# Altium PCB LM2596S_5.0.PcbDoc
Units mm, origin at the board's own origin, x right, y up, seen from the top; angles counter-clockwise.
Board outline 47.62 x 28.7 mm, 2 copper layers (Top Layer, Bottom Layer); 9 components, 4 nets, 22 pads, 60 vias.
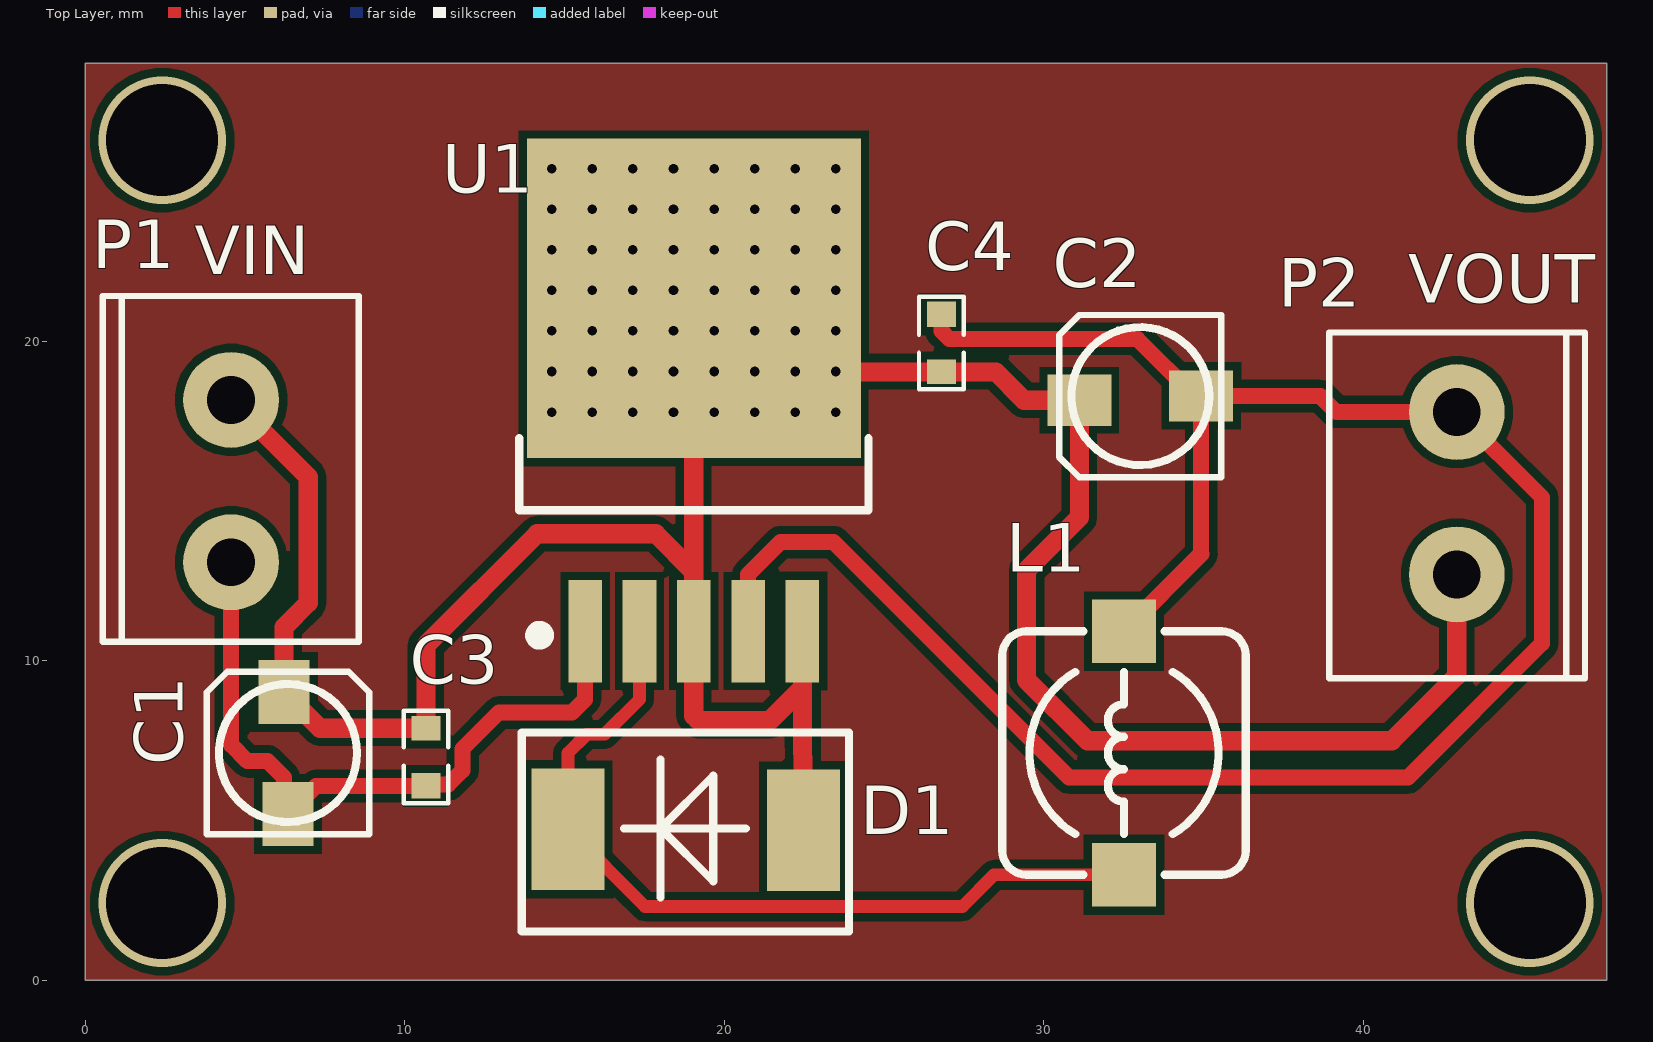
[diagram p0: Top Layer view]
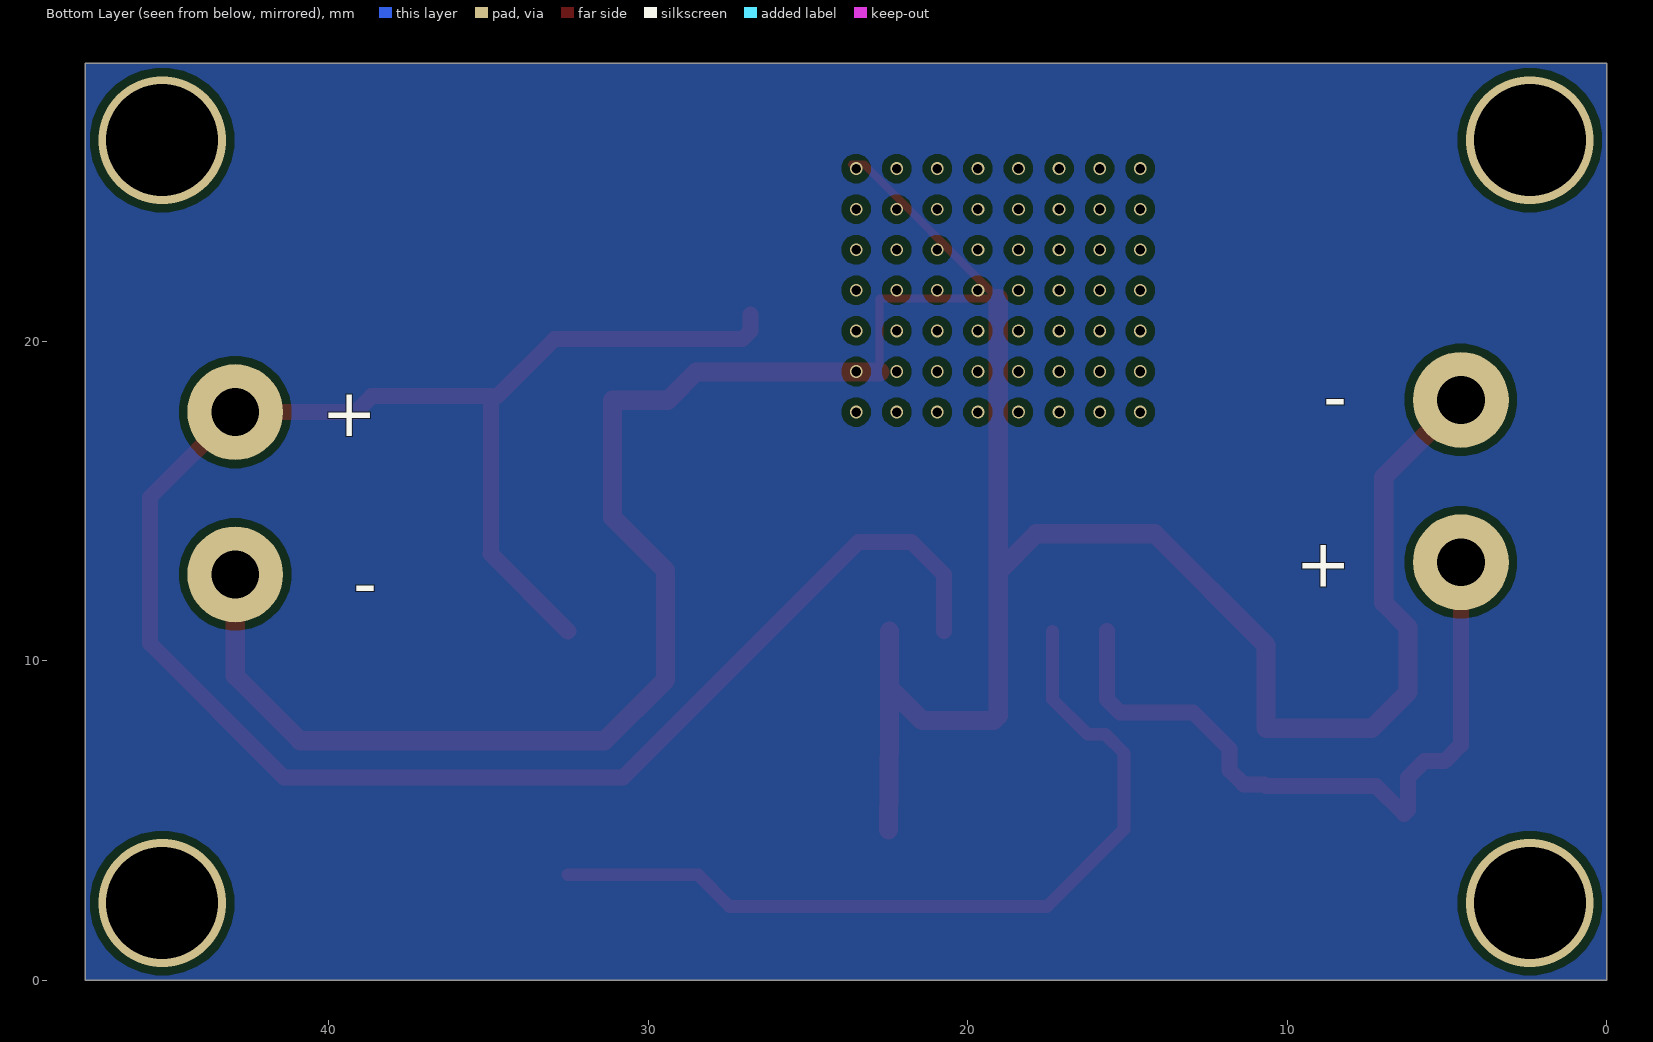
[diagram p1: Bottom Layer view, seen from below]
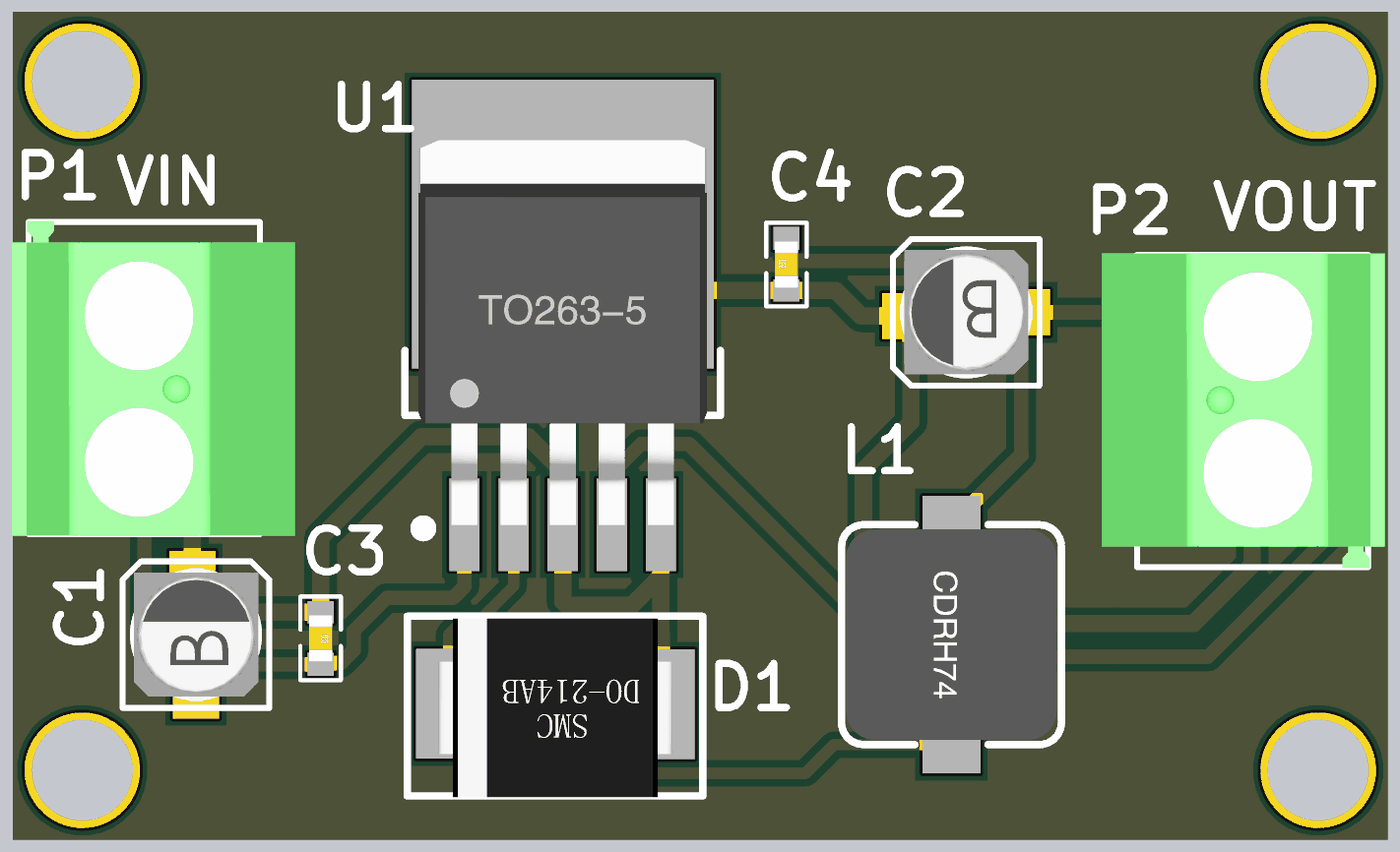
[diagram p2: 3D render of the assembled board from above, using the file's embedded part models]

## Layer stack, top to bottom
Top Solder: solder mask 0.0102, Solder Resist, Dk 3.5
Top Layer: signal copper 0.0356
Dielectric 1: dielectric 0.32, FR-4, Dk 4.8
Bottom Layer: signal copper 0.0356
Bottom Solder: solder mask 0.0102, Solder Resist, Dk 3.5

## Board outline
0,0 0,28.702 47.625,28.702 47.625,0

## Design rules (kind name [scope] priority, off if disabled: settings)
Clearance [All] p1: gap=0.254 ignorepadtopadclearanceinfootprint=FALSE except(0: Arc-Hole Track-Hole SMDPad-Hole THPad-Hole Via-Hole Fill-Hole Poly-Hole Region-Hole Text-Hole)
PolygonConnect [All] p1: connectstyle=Relief reliefconductorwidth=0.254 reliefentries=4 polygonreliefangle="90 Angle" airgapwidth=0.254
RoutingVias [All] p1: holewidth=0.711 width=1.27 viastyle="Through Hole" minholewidth=0.711 minwidth=1.27 maxholewidth=0.711 maxwidth=1.27
SolderMaskExpansion [All] p1: expansion=0.102 istentingtop=FALSE
Width [All] p1: maxlimit=0.254 minlimit=0.254 preferedwidth=0.254
30 further rules are at their usual default settings.

## Components (designator, comment, footprint, x,y, rotation, side; value= is the part's Value field where it differs from the comment)
C1 "680uf" CAP-SMD-B 6.359,7.112 r90 top
C2 "220uf" CAP-SMD-B 33.02,18.288 r180 top
C3 "104" 0603C 10.668,6.985 r270 top
C4 "104" 0603C 26.797,19.939 r90 top
D1 "SS54" SMC 22.479,4.699 r180 top
L1 "33uH" CDRH74 32.512,7.112 r90 top
P1 "Pin2x1" 5.08A-2PIN 4.572,13.081 r90 top
P2 "Pin2x1" 5.08A-2PIN 42.926,17.78 r270 top
U1 "LM2596S-5.0/NOPB" TO263-5A 19.05,10.922 r0 top (schematic designator U?)

## Footprints (in the part's own frame and the unit in brackets; to place one, negate y for a bottom-side part, rotate by r counter-clockwise, add the part's x,y. Pads: shape width x height; smd on the part's side, far side on the other; paste and mask are expansions set on the pad)
5.08A-2PIN [mm]
  round 3 hole 1.5: 1(0,0) 2(5.08,0)
  silkscreen extent -2.49,-3.99 8.33,4.01, body extent -2.54,-5.2 8.36,4.6, height 14.2
0603C [mm]
  rect 0.762x0.9 smd: 1(-0.9,0)
  rect 0.8x0.9 smd: 2(0.9,0)
  silkscreen extent -1.45,-0.7 1.45,0.7, body extent -0.8,-0.4 0.8,0.4, height 0.3
CAP-SMD-B [mm]
  rect 2x1.6 / inner rect 0x0 / far side rect 0x0 all layers, no hole: 1(1.905,0.136) 2(-1.905,0.009)
  silkscreen extent -2.54,-2.53 2.54,2.55, body extent -2.3,-2.15 2.3,2.15, height 5.2
CDRH74 [mm] "7.3*7.3*4.5mm（长宽高）"
  rect 2x2 smd: 1(-3.81,0) 2(3.81,0)
  silkscreen extent -3.81,-3.81 3.81,3.81, body extent -3.65,-3.65 3.65,3.65, height 4.5
SMC [mil] "DO-214AB(2114)"
  rect 90x149.84 smd: 1(0,0)
  rect 90x149.63 smd: 2(290,-1)
  silkscreen extent -56,-120 347,125, body extent -15,-117 305,127, height 106
TO263-5A [mm] "263，5脚晶体管"
  rect 1.05x3.2 smd: 1(-3.4,0) 2(-1.7,0) 3(0,0) 4(1.7,0) 5(3.4,0)
  rect 10.45x10 smd: 3(0,10.414)
  silkscreen extent -5.46,-0.33 5.46,6.04, body extent -5,-0.01 5,13.32, height 4.5

## Part data
C1 C2: library part CAP-SMD, "CAP-SMD", Supplier 1="Arrow Electronics"
C3 C4: library part CAP-SMT
D1: library part DIO
L1: library part L-CDRH74
P1 P2: library part HEADER_2P
U1: library part LM2596S-5.0, "SIMPLE SWITCHER® Power Converter 150 KHz 3A Step-Down Voltage Regulator, 5-pin TO-263, Pb-Free", Manufacturer="Texas Instruments", PackageTopMarking="NSUZXYTTE#*LM2596S*-5.0 P+", PowerWise=N, Code_JEDEC=MO-169-AB, ComponentLink1Description="Datasheet URL", ComponentLink1URL=http://www.ti.com/general/docs/lit/getliterature.tsp?genericPartNumber=LM2596&fileType=pdf, CompType=Switcher, PackageDescription="TO-263, Molded, .400 x .390 x .180in, 5 Lead, .067in Pitch, Surface Mount", PackageReference=KTT0005B, PinCount=5, RoHS=Y

## Via types
v1: diameter 0.4, hole 0.3, Top Layer to Bottom Layer, 56 vias
v2: diameter 4, hole 3.5, Top Layer to Bottom Layer, 4 vias

## Nets (pads, with @x,y where several pads share a name; then routed paths per layer and width w, separated by ;. In a path a pad name is that pad's centre, name@x,y a point inside that pad or via, vN(x,y) a via of type N, cw(c..) or ccw(c..) an arc to the next point about the centre after c; other vN are vias at no path point)
+12: C1.2 C3.2 P1.1 U1.1 | length 22.3
  Top Layer w0.254: C1.2@6.223,5.334 C1.2 ; C3.2 C3.2@10.71,6.127
  Top Layer w0.5: P1.1 4.572,7.366 5.08,6.858 5.715,6.858 6.223,6.35 C1.2@6.223,5.334 ; C1.2 7.228,6.085 C3.2 ; C3.2@10.71,6.127 11.368,6.127 11.811,6.57 11.811,7.239 12.954,8.382 15.24,8.382 15.65,8.792 U1.1
GND: C1.1 C2.1 C3.1 C4.1 D1.1 P1.2 P2.2 U1.3 U1.5 | length 100.2
  Top Layer w0.254: U1.3@22.758,19.039 22.758,21.336 19.05,21.336 23.241,25.527 U1.3@23.622,25.527
  Top Layer w0.6: P1.2 6.985,15.748 6.985,11.811 6.223,11.049 C1.1 7.355,7.885 C3.1 10.668,10.49 14.148,13.97 17.856,13.97 19.05,12.776 ; U1.3@19.05,21.336 19.05,12.776 ; U1.5 22.45,9.144 ; D1.1 22.45,7.827 22.45,9.144 ; U1.3@22.758,19.039 23.495,19.039 C4.1 28.499,19.039 29.386,18.152 C2.1 31.115,14.478 29.464,12.827 29.464,9.398 31.369,7.493 40.894,7.493 42.926,9.525 P2.2 ; 19.05,12.776 19.05,10.922 19.05,8.277 19.199,8.128 21.434,8.128 22.45,9.144
  other v1: 14.605,17.78 15.875,17.78 17.145,17.78 18.415,17.78 19.685,17.78 20.955,17.78 22.225,17.78 23.495,17.78 14.605,19.05 15.875,19.05 17.145,19.05 18.415,19.05 19.685,19.05 20.955,19.05 22.225,19.05 23.495,19.05 14.605,20.32 15.875,20.32 17.145,20.32 18.415,20.32 19.685,20.32 20.955,20.32 22.225,20.32 23.495,20.32 14.605,21.59 15.875,21.59 17.145,21.59 18.415,21.59 19.685,21.59 20.955,21.59 22.225,21.59 23.495,21.59 14.605,22.86 15.875,22.86 17.145,22.86 18.415,22.86 19.685,22.86 20.955,22.86 22.225,22.86 23.495,22.86 14.605,24.13 15.875,24.13 17.145,24.13 18.415,24.13 19.685,24.13 20.955,24.13 22.225,24.13 23.495,24.13 14.605,25.4 15.875,25.4 17.145,25.4 18.415,25.4 19.685,25.4 20.955,25.4 22.225,25.4 23.495,25.4
NetD1_2: D1.2 L1.1 U1.2 | length 26.3
  Top Layer w0.4: U1.2 17.35,8.79 16.256,7.696 15.697,7.696 15.113,7.112 D1.2 17.526,2.311 27.457,2.311 28.448,3.302 L1.1
VOUT: C2.2 C4.2 L1.2 P2.1 U1.4 | length 66.2
  Top Layer w0.254: C2.2@34.722,18.279 C2.2
  Top Layer w0.5: U1.4 20.75,12.7 21.766,13.716 23.419,13.716 30.785,6.35 41.402,6.35 45.593,10.541 45.593,15.113 P2.1 39.158,17.78 38.659,18.279 C2.2 34.925,13.335 ; C4.2 26.797,20.32 27.051,20.066 32.935,20.066 C2.2@34.722,18.279
  Top Layer w0.53: L1.2 34.925,13.335
copper on no net:
  other v2: 2.413,2.413 45.212,2.413 2.413,26.289 45.212,26.289

## Polygon pours and split planes (outlines as drawn)
no net on Top Layer "NONET_L01_P000" (solid, pour order 0): 0,28.702 0,0 47.625,0 47.625,28.702
no net on Bottom Layer "NONET_L02_P001" (solid, pour order 1): 0,28.702 47.625,28.702 47.625,0 0,0

## Silkscreen, mask and mechanical layers (free items; w line width, h text height)
Top Overlay:
  text "VIN" at 3.429,22.098 h1.52
  text "VOUT" at 41.402,21.209 h1.52
Bottom Overlay:
  text "-" at 8.128,17.526 h1.52
  text "+" at 38.481,17.018 h1.52
  text "+" at 8.001,12.319 h1.52
  text "-" at 38.481,11.684 h1.52
Mechanical 1:
  lines w0.254: 0,28.575 0,0 47.625,0 47.625,28.575 ; 0,28.702 11.906,28.702 35.719,28.702 47.625,28.702